# Altium PCB ESP32-EDU-BOARD V0.1.pcbdoc
Units mil, origin at the board's own origin, x right, y up, seen from the top; angles counter-clockwise.
Board outline 8230 x 5950 mil, 2 copper layers (Top Layer, Bottom Layer); 66 components, 74 nets, 230 pads, 141 vias.
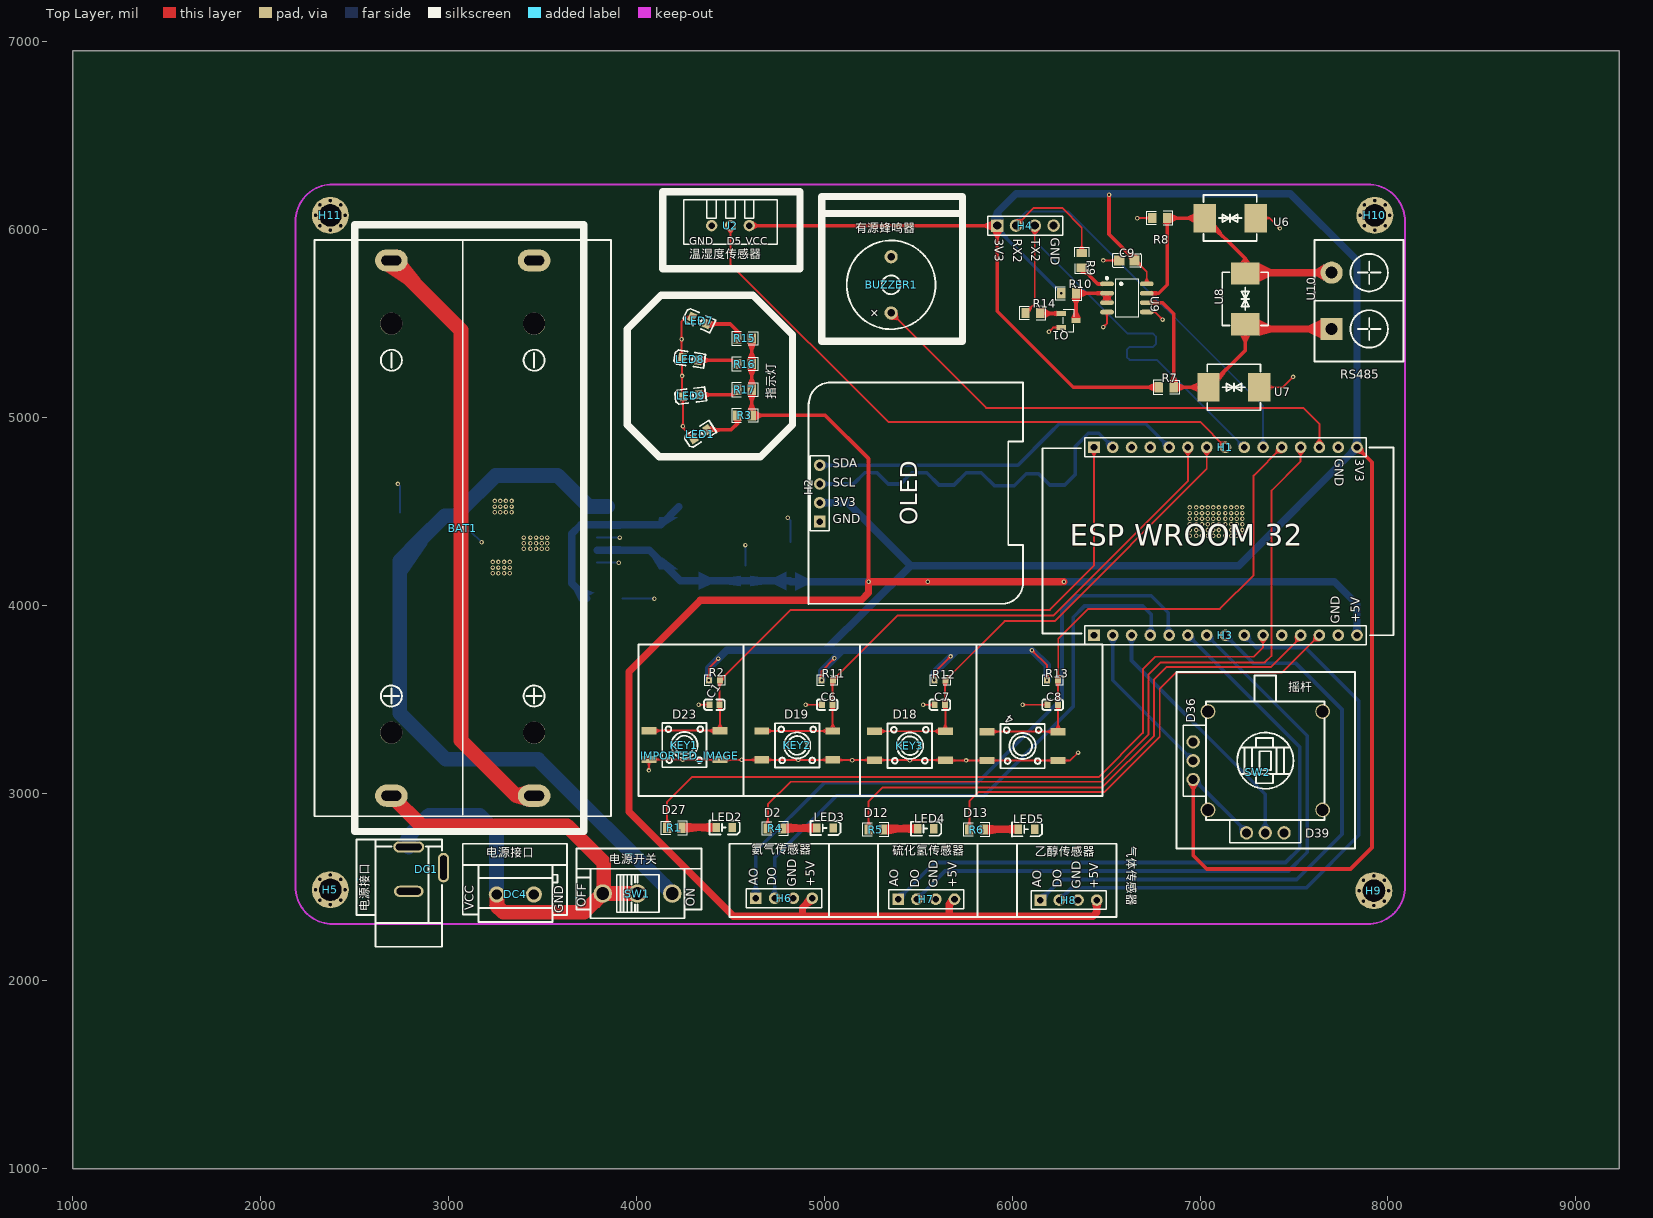
[diagram p0: Top Layer view]
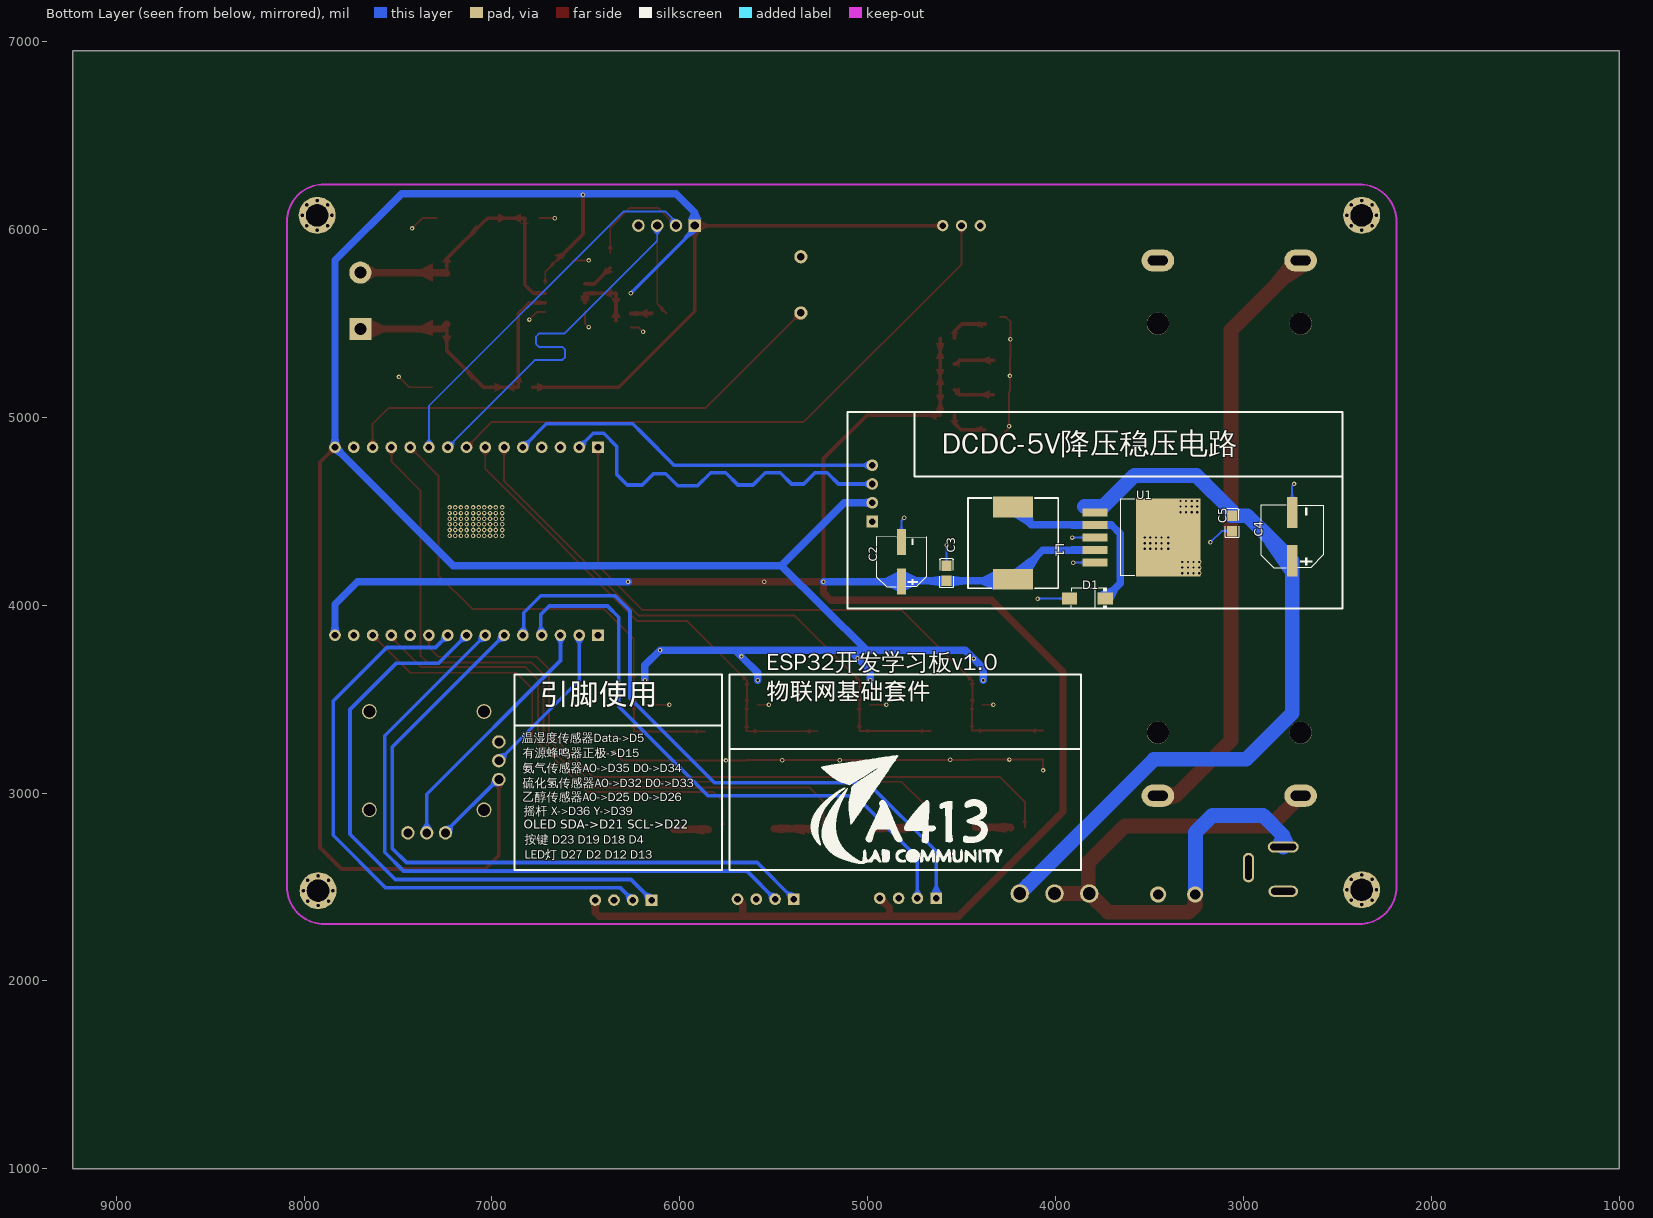
[diagram p1: Bottom Layer view, seen from below]

## Layer stack, top to bottom
Top Layer: signal copper (thickness not stored)
Dielectric: dielectric 12.6, FR-4, Dk 4.8
Bottom Layer: signal copper (thickness not stored)

## Board outline
9230,1000 1000,1000 1000,6950 9230,6950

## Components (designator, comment, footprint, x,y, rotation, side; value= is the part's Value field where it differs from the comment)
4 "K4-6×6_SMD" KEY-SMD_4P-L6.0-W6.0-P3.90-LS10.0 6055.01,3249.99 r0 top
BAT1 "18650并联电池盒" BAT-TH_18650-2 3075,4410 r90 top
BUZZER1 "TMB12A05" BUZ-TH_BD12.0-P7.60-D0.6-FD 5355,5705 r90 top
C1 "100nF" C0603 4415,3470 r0 top
C2 "220uF" CAP-SMD_BD6.3-L6.6-W6.6-FD 4820,4230 r270 bottom
C3 "100nF" C0805#1 4580,4170 r270 bottom
C4 "470uF" CAP-SMD_BD8.0-L8.3-W8.3-FD 2740,4365 r270 bottom
C5 "100nF" C0805#1 3060,4435 r270 bottom
C6 "100nF" C0603 5015,3470 r0 top
C7 "100nF" C0603 5615,3470 r0 top
C8 "100nF" C0603 6215,3470 r0 top
C9 "100nF" C0805#2 6610,5835 r180 top
D1 "SS54" SMA_L4.3-W2.6-LS5.0-RD 3830,4035 r180 bottom
DC1 "KH-DC-005-2.5" DC-IN-TH_KH-DC-005-2.5 2880,2595 r90 top
DC4 "KF301-5.0-2P" CONN-TH_P5.00_KF301-5.0-2P 3355,2460 r0 top
H1 "HDR-F-2.54_1x15" HDR-F-2.54_1X15 7135,4840 r0 top
H2 "HDR-F-2.54_1x4" HDR-F-2.54_1X4 4975,4595 r90 top
H3 "HDR-F-2.54_1x15" HDR-F-2.54_1X15 7135,3840 r0 top
H4 "12251104CNSNS295001" HDR-TH_4P-P2.54-V-M-1 6070,6020 r0 top
H5 "M3" M3 2370,2485 r0 top
H6 "HDR-F-2.54_1x4" HDR-F-2.54_1X4 4785,2440 r0 top
H7 "HDR-F-2.54_1x4" HDR-F-2.54_1X4 5542.5,2435 r0 top
H8 "HDR-F-2.54_1x4" HDR-F-2.54_1X4 6300,2430 r0 top
H9 "M3" M3 7925,2480 r0 top
H10 "M3" M3 7930,6075 r0 top
H11 "M3" M3 2370,6075 r0 top
IMPORTED_IMAGE "IMPORTED_IMAGE" IMPORTED_IMAGE 4284.22,3199.04 r0 top
KEY1 "K4-6×6_SMD" KEY-SMD_4P-L6.0-W6.0-P3.90-LS10.0 4255.01,3254.99 r0 top
KEY2 "K4-6×6_SMD" KEY-SMD_4P-L6.0-W6.0-P3.90-LS10.0 4855,3253.33 r0 top
KEY3 "K4-6×6_SMD" KEY-SMD_4P-L6.0-W6.0-P3.90-LS10.0 5455,3251.66 r0 top
L1 "33uH" IND-SMD_L12.0-W12.0 4225,4330 r90 bottom
LED1 "FC-2012HRK-620D" LED0805-RD_RED 4340,4910 r32 top
LED2 "FC-2012HRK-620D" LED0805-RD_RED 4466.66,2816.69 r180 top
LED3 "FC-2012HRK-620D" LED0805-RD_RED 5003.05,2813.41 r180 top
LED4 "FC-2012HRK-620D" LED0805-RD_RED 5539.44,2810.12 r180 top
LED5 "FC-2012HRK-620D" LED0805-RD_RED 6075.83,2806.99 r180 top
LED7 "FC-2012HRK-620D" LED0805-RD_RED 4335,5515 r335 top
LED8 "FC-2012HRK-620D" LED0805-RD_RED 4285,5310 r351 top
LED9 "FC-2012HRK-620D" LED0805-RD_RED 4290,5115 r7 top
Q1 "SS8050T23" SOT-23-3_L2.9-W1.3-P1.90-LS2.4-BR 6300,5515 r180 top
R1 "1kΩ" R0805#1 4200.83,2814.85 r0 top
R2 "10K" R0603 4415,3600 r180 top
R3 "1kΩ" R0805#1 4575,5010 r180 top
R4 "1kΩ" R0805#1 4737.22,2811.57 r0 top
R5 "1kΩ" R0805#1 5273.61,2805.15 r0 top
R6 "1kΩ" R0805#1 5810,2805 r0 top
R7 "4.7kΩ" R0805#2 6820,5160 r180 top
R8 "4.7kΩ" R0805#2 6785,6060 r0 top
R9 "1kΩ" R0805#2 6370,5835 r270 top
R10 "4.7kΩ" R0805#2 6300,5660 r0 top
R11 "10K" R0603 5015,3600 r180 top
R12 "10K" R0603 5615,3600 r180 top
R13 "10K" R0603 6215,3600 r180 top
R14 "4.7kΩ" R0805#2 6110,5555 r0 top
R15 "1kΩ" R0805#1 4575,5420 r180 top
R16 "1kΩ" R0805#1 4575,5283.33 r180 top
R17 "1kΩ" R0805#1 4575,5146.67 r180 top
SW1 "SS-12D10L3" SW-TH_SS-12D10L3 4005,2465 r0 top
SW2 "摇杆电位器 4方向 16*16 COPY COPY" SW-TH_3D_1616_4 7205,3030 r270 top
U1 "LM2596S-5.0/TR" TO-263-5_L10.2-W8.6-P1.70-LS14.4-TL 3595,4360 r0 bottom
U2 "华为牛逼3" DHT11 4500,6020 r0 top
U6 "SMCJ6.5CA-Q" SMC_L6.9-W5.9-LS7.9-BI 7160,6060 r0 top
U7 "SMCJ6.5CA-Q" SMC_L6.9-W5.9-LS7.9-BI 7180,5160 r180 top
U8 "SMCJ6.5CA-Q" SMC_L6.9-W5.9-LS7.9-BI 7240,5630 r90 top
U9 "MAX485ED" SOP-8_L4.9-W3.9-P1.27-LS6.0-BL 6610,5635 r270 top
U10 "KF7.62-2P" CONN-TH_KF7.62-2P 7700,5620 r90 top

## Footprints (in the part's own frame and the unit in brackets; to place one, negate y for a bottom-side part, rotate by r counter-clockwise, add the part's x,y. Pads: shape width x height; smd on the part's side, far side on the other; paste and mask are expansions set on the pad)
BAT-TH_18650-2 [mm]
  oval 3x4.4 hole 1.34 slot 2.7 at 90 deg: 1(-36.185,9.65) 2(-36.185,-9.65) 3(36.185,9.65) 4(36.185,-9.65)
  round 3 hole 3 unplated: ""(-27.65,-9.65) ""(-27.65,9.65) ""(27.65,-9.65) ""(27.65,9.65)
  silkscreen extent -38.95,-20.05 38.95,20.06
BUZ-TH_BD12.0-P7.60-D0.6-FD [mm]
  round 1.8 hole 1: 1(-3.8,0) 2(3.8,0)
  silkscreen extent -6,-6 6,6
C0603 [mm]
  rect 0.8x0.9 smd: 1(-0.7,0) 2(0.7,0)
  silkscreen extent -1.41,-0.71 1.39,0.72
C0805#1 [mm]
  rect 1.41x1.35 smd: 1(1.03,0) 2(-1.03,0)
  silkscreen extent -1.96,-0.9 1.96,0.9
C0805#2 [mm]
  rect 1.41x1.35 smd: 1(-1.03,0) 2(1.03,0)
  silkscreen extent -1.96,-0.9 1.96,0.9
CAP-SMD_BD6.3-L6.6-W6.6-FD [mm]
  rect 3.5x1.2 smd: 1(2.67,0) 2(-2.67,0)
  silkscreen extent -3.38,-3.38 3.38,3.38
CAP-SMD_BD8.0-L8.3-W8.3-FD [mm]
  rect 4.2x1.4 smd: 1(3.267,0) 2(-3.267,0)
  silkscreen extent -4.2,-4.23 4.2,4.23
CONN-TH_KF7.62-2P [mm]
  rect 3x3 hole 1.6: 1(-3.81,0)
  round 3 hole 1.6: 2(3.81,0)
  silkscreen extent -8.22,-9.7 8.22,2.3
CONN-TH_P5.00_KF301-5.0-2P [mm]
  round 2.2 hole 1.4: 1(-2.5,0) 2(2.5,0)
  silkscreen extent -5,-3.7 5.71,4
DC-IN-TH_KH-DC-005-2.5 [mm]
  oval 1.5x4.2 hole 0.9 slot 3.5 at 90 deg: 1(3,2.35)
  oval 1.5x4 hole 0.9 slot 3.3 at 90 deg: 2(-3,2.35)
  oval 4x1.5 hole 0.9 slot 3.3 at 0 deg: 3(0.2,-2.35)
  silkscreen extent -10.5,-2.15 4,6.85
DHT11 [mil]
  round 60 hole 36: 1(-100,0) 2(0,0) 3(100,0)
  silkscreen extent -248,-98 248,138
HDR-F-2.54_1X4 [mil]
  rect 62x62 hole 35: 1(-150,0)
  round 62 hole 35: 2(-50,0) 3(50,0) 4(150,0)
  silkscreen extent -200,-50 200,50
HDR-F-2.54_1X15 [mil]
  rect 62x62 hole 35: 1(-700,0)
  round 62 hole 35: 2(-600,0) 3(-500,0) 4(-400,0) 5(-300,0) 6(-200,0) 7(-100,0) 8(0,0) 9(100,0) 10(200,0) 11(300,0) 12(400,0) 13(500,0) 14(600,0) 15(700,0)
  silkscreen extent -750,-50 750,50
HDR-TH_4P-P2.54-V-M-1 [mm]
  rect 1.7x1.7 hole 1.1: 1(-3.81,0)
  round 1.7 hole 1.1: 2(-1.27,0) 3(1.27,0) 4(3.81,0)
  silkscreen extent -5.08,-1.27 5.08,1.27
IMPORTED_IMAGE [mil]
IND-SMD_L12.0-W12.0 [mm]
  rect 2.8x5.4 smd: 1(-4.9,0) 2(4.9,0)
  silkscreen extent -6.1,-6.1 6.1,6.1
KEY-SMD_4P-L6.0-W6.0-P3.90-LS10.0 [mm]
  rect 2x1 smd: 1(-4.8,1.95) 2(4.8,1.95) 3(-4.8,-1.95) 4(4.8,-1.95)
  silkscreen extent -3,-3 3,3
LED0805-RD_RED [mm]
  rect 1x1.25 smd: 1(-1.1,0) 2(1.1,0)
  silkscreen extent -2.1,-0.95 1.98,0.96
M3 [mm]
  round 0.6 hole 0.4 slot 0.405 at 0 deg: 1(-2,0) 1(-1.41,-1.41) 1(-1.41,1.41) 1(0,-2) 1(0,2) 1(1.41,-1.41) 1(1.41,1.41) 1(2,0)
  round 5 hole 3 slot 3.005 at 0 deg: 1(0,0)
R0603 [mil]
  rect 31.75x34.02 smd: 1(-29.65,0) 2(29.65,0)
  silkscreen extent -55,-26 55,26
R0805#1 [mil]
  rect 44.59x54.21 smd: 1(-38.04,0) 2(38.04,0)
  silkscreen extent -69,-36 69,36
R0805#2 [mil]
  rect 44.59x54.21 smd: 1(-39.37,0) 2(39.37,0)
  silkscreen extent -69,-36 69,36
SMA_L4.3-W2.6-LS5.0-RD [mm]
  rect 2.046x1.62 smd: 1(2.404,0.009) 2(-2.404,-0.009)
  silkscreen extent -2.16,-1.44 2.61,1.44
SMC_L6.9-W5.9-LS7.9-BI [mm]
  rect 3.03x3.82 smd: 1(-3.435,0) 2(3.435,0)
  silkscreen extent -3.6,-3.11 3.6,3.11
SOP-8_L4.9-W3.9-P1.27-LS6.0-BL [mm]
  oval 0.63x1.865 smd: 1(-1.905,-2.682) 2(-0.635,-2.682) 3(0.635,-2.682) 4(1.905,-2.682) 5(1.905,2.682) 6(0.635,2.682) 7(-0.635,2.682) 8(-1.905,2.682)
  silkscreen extent -2.82,-2.83 2.58,1.52
SOT-23-3_L2.9-W1.3-P1.90-LS2.4-BR [mm]
  rect 1.25x0.7 smd: 1(1,-0.95) 2(1,0.95) 3(-1,0)
  silkscreen extent -0.73,-1.53 0.73,1.53
SW-TH_3D_1616_4 [mm]
  round 1.8 hole 1.2: 1(6.146,6.146) 2(6.146,3.606) 3(6.146,1.066) (1)(-1.066,-6.146) (2)(-3.606,-6.146) (3)(-6.146,-6.146)
  round 2 hole 1.6: 4(-10.255,11.355) 4(-10.255,-4.144) 4(3.044,-4.144) 4(3.044,11.355)
  silkscreen extent -15.11,-7.49 7.49,11.61
SW-TH_SS-12D10L3 [mm]
  round 2.5 hole 1.7: 1(-4.7,0) 2(0,0) 3(4.7,0)
  silkscreen extent -6.35,-3.35 6.35,3.35
TO-263-5_L10.2-W8.6-P1.70-LS14.4-TL [mm]
  rect 3.4x1.1 smd: 1(4.953,-3.4) 2(4.953,-1.7) 3(4.953,0) 4(4.953,1.7) 5(4.953,3.4)
  rect 8.705x10.587 smd: 6(-4.953,0)
  silkscreen extent -0.45,-5.17 1.52,5.17

## Via types
v1: diameter 24, hole 12, Top Layer to Bottom Layer, tented both sides, 141 vias

## Nets (pads, with @x,y where several pads share a name; then routed paths per layer and width w, separated by ;. In a path a pad name is that pad's centre, name@x,y a point inside that pad or via, vN(x,y) a via of type N, cw(c..) or ccw(c..) an arc to the next point about the centre after c; other vN are vias at no path point)
3V3: C9.1 H1.15 H2.2 H4.1 R2.2 R7.2 R10.1 R11.2 R12.2 R13.2 SW2.3 SW2.(1) U2.3 U9.8 | length 18009.2
  Top Layer w10: R2.2 4385.3,3665.3 v1(4435.58,3715.58) ; v1(4985.34,3600) 4985.3,3649.1 v1(5053.49,3717.27) ; v1(5585.34,3600) 5585.3,3640.3 v1(5671.78,3726.78) ; v1(6105,3760) 6185.3,3679.7 v1(6185.34,3600) ; C9.1@6649.4,5840 6715.6,5773.8 U9.8
  Top Layer w19.68: U2.3 H4.1 5920,5565 6325,5160 R7.2 ; v1(6515,6185) 6515,5974.4 C9.1@6649.4,5840 ; 6963.1,3072 6963.1,2667 7035,2595 7800,2595 7915,2710 7915,4760 H1.15
  Bottom Layer w19.68: H4.1 5920,6000.6 v1(6260.63,5660) ; 6963.05,3071.95 6968.05,3071.95 SW2.3@7251.95,2788.05
  Bottom Layer w39.37: v1(4385,3600) 4385,3665 v1(4435.58,3715.58) 4480,3760 5005,3760 ; H2.2 5125,4545 5460,4210 ; v1(4985.34,3600) 4985.34,3649.12 v1(5053.49,3717.27) 5096.22,3760 ; v1(5585.34,3600) 5585.3,3640.3 v1(5671.78,3726.78) 5705,3760 5705.6,3760 ; H4.1 5920,6090 6020,6190 7480,6190 7835,5835 H1.15 7205,4210 5460,4210 ; v1(6185.34,3600) 6185.34,3679.66 v1(6105,3760) 5005,3760 ; 5005,3760 5010,3760 5010,3765 5460,4210
+5V: C2.1 C3.1 H3.15 H6.4 H7.4 H8.4 L1.1 R3.1 R15.1 R16.1 R17.1 U1.4 | length 11376.7
  Top Layer w19.68: R15.1 R16.1 R17.1 R3.1 5005,5010 5235,4780 v1(5235,4125)
  Top Layer w39.37: 4883.34,2345 4883.34,2388.34 H6.4 ; 5664.78,2345 5664.78,2407.28 H7.4 ; v1(6275,4125) v1(5550,4125) v1(5235,4125) 5235,4065 5195,4025 4340,4025 3960,3645 3960,2900 4515,2345 6430,2345 6450,2365 H8.4
  Bottom Layer w39.37: U1.4 4069,4293.1 L1.1 4232.6,4129.5 4580,4129.5 4815.4,4129.5 C2.1 5234.9,4124.9 v1(5235,4125) ; v1(6275,4125) 7715,4125 7835,4005 H3.15
BAT1_2: BAT1.2 BAT1.3 | length 3219.7
  Top Layer w78.74: BAT1.3 3065,5464.7 3065,3280 3359.6,2985.4 BAT1.2
D2: H1.12 R4.1 | length 4497.6
  Top Layer w10: R4.1 4699.2,2939.2 4820,3060 6475,3060 6725,3310 6725,3630 6790,3695 7345,3695 7380,3730 7380,4610 7535,4765 H1.12
D4: 4.1 4.2 C8.2 H1.11 R13.1 | length 2796.1
  Top Layer w10: 4.1 4.2 6244,3468.6 C8.2 6242.6,3597.9 R13.1 6244.7,3820.3 6404.3,3980 7105,3980 7285,4160 7285,4690 H1.11
D5: H1.8 U2.2 | length 3243.9
  Top Layer w10: U2.2 4500,5815 5340,4975 7000,4975 H1.8
D12: H3.12 R5.1 | length 2997.8
  Top Layer w10: R5.1 5235.6,2955.6 5310,3030 6480,3030 6755,3305 6755,3605 6820,3670 7375,3670 7535,3830 H3.12
D13: H3.13 R6.1 | length 2530.1
  Top Layer w10: R6.1 5772,2957 5820,3005 6490,3005 6785,3300 6785,3555 6870,3640 7435,3640 H3.13
D15: BUZZER1.1 H1.13 | length 2649.5
  Top Layer w10: BUZZER1.1 5860.39,5050 7550,5050 7635,4965 H1.13
D18: C7.2 H1.7 KEY3.1 KEY3.2 R12.1 | length 2622.3
  Top Layer w10: KEY3.1 KEY3.2 5644,3468.6 C7.2 5642.6,3597.9 R12.1 5959.7,3915 6225,3915 7035,4725 H1.7
D19: C6.2 H1.6 KEY2.1 KEY2.2 R11.1 | length 3158.7
  Top Layer w10: KEY2.1 KEY2.2 5044,3468.6 C6.2 5042.6,3597.9 R11.1 5389.7,3945 6220,3945 6935,4660 H1.6
D21: H1.5 H2.4 | length 2002.9
  Bottom Layer w19.68: H2.4 6030,4745 6198.8,4913.8 6250,4965 6710,4965 H1.5
D22: H1.2 H2.3 | length 2002
  Bottom Layer w19.68: H2.3 5155,4645 5215,4705 5280,4705 5340,4645 5405,4645 5465,4705 5545,4705 5610,4640 5690,4640 5755,4705 5835,4705 5905,4635 6010,4635 6075,4700 6140,4700 6200,4640 6280,4640 6335,4695 6335,4845 6405,4915 6460,4915 H1.2
D23: C1.2 H1.1 KEY1.1 KEY1.2 R2.1 | length 3520.6
  Top Layer w10: KEY1.1 KEY1.2 4444,3468.6 C1.2 4442.6,3597.9 R2.1 4819.7,3975 6200,3975 6435,4210 H1.1
D25: H3.8 H8.1 | length 3198.6
  Bottom Layer w19.68: H8.1 6260,2540 7515,2540 7755,2780 7755,3445 7510,3690 7285,3690 H3.8
D26: H3.9 H8.2 | length 3207.9
  Bottom Layer w19.68: H8.2 6315,2495 7565,2495 7845,2775 7845,3490 7560,3775 7300,3775 H3.9
D27: H3.10 R1.1 | length 3914.8
  Top Layer w10: R1.1 4162.8,2952.8 4295,3085 6460,3085 6695,3320 6695,3660 6760,3725 7285,3725 7335,3775 H3.10
D32: H3.6 H7.1 | length 3630.8
  Bottom Layer w19.68: H7.1 5587.5,2630 7455,2630 7530,2705 7530,3245 H3.6
D33: H3.7 H7.2 | length 3557.7
  Bottom Layer w19.68: H7.2 5642.5,2585 7470,2585 7570,2685 7570,3305 H3.7
D34: H3.4 H6.2 | length 3184
  Bottom Layer w19.68: H6.2 4735,2655 5065,2985 5850,2985 6325,3460 6325,3935 6385,3995 6695,3995 6740,3950 6740,3845 H3.4
D35: H3.5 H6.1 | length 3440.1
  Bottom Layer w19.68: H6.1 4635,2690 5000,3055 5815,3055 6265,3505 6265,3970 6345,4050 6740,4050 6830,3960 6830,3845 H3.5
D36: H3.2 SW2.(2) | length 845.4
  Bottom Layer w19.68: H3.2 6535,3600 6963.05,3171.95
D39: H3.3 SW2.2 | length 1346.8
  Bottom Layer w19.68: H3.3 6635,3705 7346.95,2993.05 SW2.2
DC1_1: BAT1.1 DC1.1 DC4.1 SW1.1 SW1.2 | length 3248.8
  Top Layer w78.74: BAT1.1 2855.47,2825 3630,2825 3825,2630 3825,2470.04 SW1.1 ; DC4.1 3256.58,2398.42 3290,2365 3719.96,2365 SW1.1 ; SW1.2 SW1.1
  Bottom Layer w78.74: DC1.1 2787.5,2772.5 2895,2880 3165,2880 3255,2790 3255,2461.6 DC4.1
GND: 4.3 4.4 BAT1.4 BUZZER1.2 C1.1 C2.2 C3.2 C4.2 C5.1 C6.1 C7.1 C8.1 C9.2 D1.2 DC1.2 DC4.2 H1.14 H2.1 H3.14 H4.4 H6.3 H7.3 H8.3 KEY1.3 KEY1.4 KEY2.3 KEY2.4 KEY3.3 KEY3.4 LED1.1 LED2.1 LED3.1 LED4.1 LED5.1 LED7.1 LED8.1 LED9.1 Q1.2 R8.1 SW2.1 SW2.(3) U1.3 U1.5 U1.6 U2.1 U6.2 U7.1 U9.4 U9.5 | length 5146.2
  Top Layer w10: v1(4066.03,3120) KEY1.3 v1(4245.18,3178.22) KEY1.4 4445.6,3176.6 v1(4559.93,3176.55) KEY2.3 v1(4860.5,3176.55) KEY2.4 5045.6,3174.9 v1(5148.4,3174.89) KEY3.3 v1(5454.68,3174.89) KEY3.4 5645.6,3173.2 v1(5753.97,3173.22) 4.3 4.4 6308.2,3173.2 v1(6350,3215) ; LED7.1@4295.8,5533.3 4263.3,5533.3 4240,5510 v1(4240,5414.86) 4240,5319 LED8.1 v1(4242.22,5219.86) 4242.2,5140 4247,5135.2 LED9.1 v1(4247.01,4951.91) 4247,4943.3 LED1.1@4303.3,4887.1 ; v1(4330,3470) C1.1 ; v1(4900,3470) C6.1 ; v1(5525,3470) C7.1 ; v1(6055,3470) C8.1 ; v1(6195,5455) 6217.6,5477.6 Q1.2 ; v1(6485,5480) 6504.4,5499.4 U9.4 ; v1(6485,5835) C9.2 ; v1(6665,6060) R8.1 ; U9.5 6760,5560 v1(6800,5520) ; U6.2 7370,6060 v1(7425,6005) ; U7.1 7440,5160 v1(7495,5215)
  Bottom Layer w10: v1(2730,4645) 2740,4635 C4.2 ; C5.1@3060,4394.5 3115.6,4394.5 v1(3175,4335) ; U1.5 v1(3905,4226.14) ; U1.3 v1(3910,4360) ; D1.2 v1(4095,4034.63) ; C3.2@4580,4210.5 v1(4580,4320) ; v1(4805,4465) 4820,4450 C2.2
  other v1: 3235,4170 3265,4170 3295,4170 3325,4170 3235,4200 3265,4200 3295,4200 3325,4200 3235,4230 3265,4230 3295,4230 3325,4230 3400,4300 3435,4300 3465,4300 3495,4300 3525,4300 3400,4330 3435,4330 3465,4330 3495,4330 3525,4330 3400,4360 3435,4360 3465,4360 3495,4360 3525,4360 6945,4370 6980,4370 7010,4370 7040,4370 7070,4370 7100,4370 7135,4370 7165,4370 7195,4370 7225,4370 6945,4400 6980,4400 7010,4400 7040,4400 7070,4400 7100,4400 7135,4400 7165,4400 7195,4400 7225,4400 6945,4430 6980,4430 7010,4430 7040,4430 7070,4430 7100,4430 7135,4430 7165,4430 7195,4430 7225,4430 6945,4460 6980,4460 7010,4460 7040,4460 7070,4460 7100,4460 7135,4460 7165,4460 7195,4460 7225,4460 6945,4490 6980,4490 7010,4490 7040,4490 7070,4490 7100,4490 7135,4490 7165,4490 7195,4490 7225,4490 3245,4495 3275,4495 3305,4495 3335,4495 6945,4520 6980,4520 7010,4520 7040,4520 7070,4520 7100,4520 7135,4520 7165,4520 7195,4520 7225,4520 3245,4525 3275,4525 3305,4525 3335,4525 3245,4555 3275,4555 3305,4555 3335,4555
L1_2: D1.1 L1.2 U1.2 | length 1007.1
  Bottom Layer w39.37: D1.1 3655,4115.7 3655,4380 3701.9,4426.9 U1.2 4129,4426.9 L1.2
Q1_1: Q1.1 R14.2 | length 112.3
  Top Layer w19.68: R14.2 6152,5552.4 Q1.1
R1_2: LED2.2 R1.2 | length 185.2
  Top Layer w39.37: R1.2 4240.7,2816.7 LED2.2
R3_2: LED1.2 R3.2 | length 217.4
  Top Layer w19.68: LED1.2@4376.7,4933 4502.9,4933 4537,4967 R3.2
R4_2: LED3.2 R4.2 | length 185.1
  Top Layer w39.37: R4.2 4777.1,2813.4 LED3.2
R5_2: LED4.2 R5.2 | length 186.5
  Top Layer w39.37: R5.2 5316.6,2810.1 LED4.2
R6_2: LED5.2 R6.2 | length 185.3
  Top Layer w39.37: R6.2 5850,2807 LED5.2
R9_2: R9.2 U9.1 | length 169.9
  Top Layer w19.68: R9.2 6455.6,5710 U9.1
R15_2: LED7.2 R15.2 | length 216.7
  Top Layer w19.68: LED7.2@4374.3,5496.7 4498.3,5496.7 4537,5458 R15.2
R16_2: LED8.2 R16.2 | length 217.4
  Top Layer w19.68: LED8.2 4510,5303.2 4529.9,5283.3 R16.2
R17_2: LED9.2 R17.2 | length 214.9
  Top Layer w19.68: LED9.2 4510.6,5120.3 R17.2
RX2: H1.10 H4.2 R9.1 | length 2574.9
  Top Layer w10: H4.2 6115,6115 6265,6115 6370,6010 R9.1
  Bottom Layer w10: H4.2 6020,6040 6075,6095 6300,6095 7335,5060 H1.10
S$7036: 
S$7049: 
S$7068: 
S$7072: 
S$7076: 
S$7080: 
S$7084: 
S$7088: 
S$7101: 
S$27367: 
S$27392: 
S$31513: 
S$31517: 
S$31521: 
S$31525: 
S$31529: 
S$31611: 
S$31615: 
S$31619: 
S$39779: 
S$39783: 
S$39787: 
S$39803: 
S$39855: 
S$39859: 
S$39863: 
S$39867: 
S$39871: 
S$39875: 
S$43471: 
S$44675: 
S$45294: 
TX2: H1.9 H4.3 R14.1 | length 2493
  Top Layer w10: R14.1 6120,5604.4 H4.3
  Bottom Layer w10: H4.3 6120,5940 6615,5445 6750,5445 6765,5430 6765,5390 6750,5375 6625,5375 6610,5360 6610,5320 6625,5305 6770,5305 H1.9
U6_1: R8.2 U6.1 U8.2 U9.7 U10.2 | length 1545.8
  Top Layer w19.68: U9.7 6780,5660 6825,5705 6825,6020.6 ; 6825,6009.2 6824.4,6026.3 R8.2 U6.1 7240,5844.8 U8.2 ; U6.1@7024.77,6055 U6.1
  Top Layer w39.37: U8.2 7244.8,5770 U10.2
U7_2: R7.1 U7.2 U8.1 U9.6 U10.1 | length 1630.3
  Top Layer w19.68: U9.6 6800,5610 6859.4,5550.6 R7.1 U7.2 7240,5355.2 U8.1
  Top Layer w39.37: U8.1 7264.8,5470 U10.1
U9_2: Q1.3 R10.2 U9.2 U9.3 | length 360
  Top Layer w19.68: Q1.3 R10.2 U9.2 U9.3
VIN: C4.1 C5.2 SW1.3 U1.1 | length 4034.6
  Bottom Layer w78.74: 3845,4525 3745,4525 3580,4690 3250,4690 3060,4500 3060,4475.5 2979.2,4475.5 C4.1 2740,3425 2985,3180 3475,3180 SW1.3
pads on no net: BAT1. DC1.3 H1.3 H1.4 H3.1 H3.11 H5.1 H9.1 H10.1 H11.1 SW2.4

## Polygon pours and split planes (outlines as drawn)
GND on Top Layer (solid): 1810,6450 8580,6450 8580,1710 8370,1500 1905,1500 1755,1650
GND on Bottom Layer (solid): 1530,6450 8700,6450 8730,6420 8730,1810 8595,1675 1685,1675 1500,1860

## Keep-outs
Keep-Out Layer:
  lines w10: 2185,2499.85 ccw(c2381.85,2499.85) 2381.85,2303 ; 2185,6043.15 cw(c2381.85,6043.15) 2381.85,6240 ; 7893.65,2303 ccw(c7893.65,2499.85) 8090.5,2499.85 ; 7893.65,6240 cw(c7893.65,6043.15) 8090.5,6043.15

## Other copper
Top Layer:
  region net D5: 4522.5,6000.16 4477.5,6000.16 4495,5979.16 4505,5979.16
  region net 3V3: 4619.84,5997.5 4619.84,6042.5 4640.84,6029.84 4640.84,6010.16
  region net 3V3: 6989.63,3048.51 6936.48,3048.51 6953.21,3023.71 6972.89,3023.71
  region net D15: 5352.78,5520.03 5390.36,5557.61 5392.65,5524.82 5385.58,5517.74
  region net DC1_1: 3289.06,2431.36 3224.1,2431.36 3217.21,2401.04 3295.95,2401.04
  region net 3V3: 7833.06,4809.06 7865.94,4841.94 7871.8,4817.12 7857.88,4803.2
  region net D15: 7658.25,4860.5 7611.75,4860.5 7630,4882.2 7640,4882.2
  region net D2: 7558.25,4819.5 7511.75,4819.5 7530,4797.8 7540,4797.8
  region net D4: 7404.06,4841.94 7436.94,4809.06 7408.69,4806.62 7401.62,4813.69
  region net D5: 7104.06,4838.06 7136.94,4870.94 7108.69,4873.38 7101.62,4866.31
  region net D18: 7058.25,4819.5 7011.75,4819.5 7030,4797.8 7040,4797.8
  region net D19: 6958.25,4819.5 6911.75,4819.5 6930,4797.8 6940,4797.8
  region net D13: 7604.06,3841.94 7636.94,3809.06 7608.69,3806.62 7601.62,3813.69
  region net D12: 7542.1,3809.82 7504.17,3836.73 7506.44,3808.51 7514.72,3802.64
  region net D27: 7358.25,3819.5 7311.75,3819.5 7330,3797.8 7340,3797.8
  region net +5V: 4904.06,2441.94 4936.94,2409.06 4919.08,2396.24 4891.24,2424.08
  region net +5V: 5661.56,2436.94 5694.44,2404.06 5678.69,2393.36 5650.86,2421.19
  region net +5V: 6473.25,2409.5 6426.75,2409.5 6430.31,2387.8 6469.69,2387.8
  region net RX2: 6017.9,6053.4 6053.4,6017.9 6055.75,6048.68 6048.68,6055.75
  region net TX2: 6145.1,5997.87 6094.9,5997.87 6115,5974.44 6125,5974.44
  region net DC1_1: 3823.04,2415.88 3770.84,2468.08 3744.75,2445.46 3800.42,2389.79
  region net DC1_1: 3852.51,2428.09 3852.51,2501.91 3886.96,2504.37 3886.96,2425.63
  region net DC1_1: 3972.45,2428.09 3972.45,2501.91 3938,2504.37 3938,2425.63
  region net U6_1: 7660.94,5725.71 7660.94,5814.29 7619.6,5789.69 7619.6,5750.31
  region net +5V: 5226,4132.94 5244,4132.94 5244.84,4141.34 5225.16,4141.34
  region net 3V3: 4394.16,3607.75 4376.17,3608.12 4380.34,3616.44 4390.34,3616.23
  region net 3V3: 4976.34,3607.94 4994.34,3607.94 4990.34,3616.34 4980.34,3616.34
  region net 3V3: 5576.34,3607.94 5594.34,3607.94 5590.34,3616.34 5580.34,3616.34
  region net 3V3: 6176.34,3607.94 6194.34,3607.94 6190.34,3616.34 6180.34,3616.34
  region net 3V3: 6506,6177.06 6524,6177.06 6524.84,6168.66 6505.16,6168.66
  region net 3V3: 4436.33,3703.6 4423.6,3716.33 4420.49,3707.56 4427.56,3700.49
  region net 3V3: 5054.24,3705.29 5041.51,3718.02 5038.4,3709.25 5045.47,3702.18
  region net 3V3: 5672.53,3714.81 5659.81,3727.53 5656.69,3718.77 5663.77,3711.69
  region net 3V3: 6116.98,3760.75 6104.25,3748.02 6113.02,3744.91 6120.09,3751.98
  region net 3V3: 6622.79,5840.68 6667.35,5861.57 6627.72,5875.6 6608.77,5866.71
  region net 3V3: 6678.31,5831.21 6668.01,5808.43 6681.18,5801.15 6685.58,5810.89
  region net D4: 5905.4,3339.3 5905.4,3314.3 5920.4,3321.8 5920.4,3331.8
  region net D4: 6231.5,3346.46 6256.5,3346.46 6249,3361.46 6239,3361.46
  region net D4: 6204.61,3314.3 6204.61,3339.3 6189.61,3331.8 6189.61,3321.8
  region net R15_2: 4402.49,5510.68 4385.57,5474.4 4423.96,5486.86 4433.14,5506.54
  region net R16_2: 4351.07,5324.45 4343.85,5278.9 4376.04,5293.36 4379.16,5313.04
  region net R17_2: 4349.82,5144.72 4355.52,5098.26 4383.77,5110.46 4381.36,5130.14
  region net R15_2: 4514.66,5447.11 4559.25,5447.11 4546.84,5458 4527.16,5458
  region net +5V: 4590.75,5392.89 4635.34,5392.89 4622.84,5363.37 4603.16,5363.37
  region net R16_2: 4514.66,5261.38 4518.5,5310.44 4516.96,5310.16 4508.99,5290.29
  region net +5V: 4635.34,5310.44 4590.75,5310.44 4603.16,5339.97 4622.84,5339.97
  region net +5V: 4590.75,5256.23 4635.34,5256.23 4622.84,5226.7 4603.16,5226.7
  region net R17_2: 4536.21,5119.56 4514.66,5163.8 4506.04,5129.66 4517.56,5113.34
  region net +5V: 4635.34,5173.77 4590.75,5173.77 4603.16,5203.3 4622.84,5203.3
  region net +5V: 4590.75,5119.56 4635.34,5119.56 4622.84,5090.03 4603.16,5090.03
  region net R3_2: 4386.87,4953.87 4406.46,4922.52 4440.88,4923.16 4428.58,4942.84
  region net R4_2: 4940.06,2788.79 4940.06,2838.01 4881,2833.09 4881,2793.72
  region net R5_2: 5476.45,2785.51 5476.45,2834.72 5417.4,2829.79 5417.4,2790.42
  region net R6_2: 6012.84,2782.38 6012.84,2831.59 5953.78,2826.68 5953.78,2787.31
  region net D23: 4105.4,3344.3 4105.4,3319.3 4120.4,3326.8 4120.4,3336.8
  region net D23: 4431.5,3351.46 4456.5,3351.46 4449,3366.46 4439,3366.46
  region net D23: 4404.61,3319.3 4404.61,3344.3 4389.61,3336.8 4389.61,3326.8
  region net D19: 4705.4,3342.6 4705.4,3317.6 4720.4,3325.1 4720.4,3335.1
  region net D19: 5031.5,3349.79 5056.5,3349.79 5049,3364.79 5039,3364.79
  region net D19: 5004.61,3317.6 5004.61,3342.6 4989.61,3335.1 4989.61,3325.1
  region net D18: 5305.4,3340.9 5305.4,3315.9 5320.4,3323.4 5320.4,3333.4
  region net D18: 5631.5,3348.12 5656.5,3348.12 5649,3363.12 5639,3363.12
  region net D18: 5604.61,3315.9 5604.61,3340.9 5589.61,3333.4 5589.61,3323.4
  region net D23: 4430.1,3487.72 4455.1,3487.72 4447.6,3502.72 4437.6,3502.72
  region net D23: 4456.5,3452.28 4431.5,3452.28 4439,3437.28 4449,3437.28
  region net D19: 5030.1,3487.72 5055.1,3487.72 5047.6,3502.72 5037.6,3502.72
  region net D19: 5056.5,3452.28 5031.5,3452.28 5039,3437.28 5049,3437.28
  region net D18: 5630.1,3487.72 5655.1,3487.72 5647.6,3502.72 5637.6,3502.72
  region net D18: 5656.5,3452.28 5631.5,3452.28 5639,3437.28 5649,3437.28
  region net D4: 6230.1,3487.72 6255.1,3487.72 6247.6,3502.72 6237.6,3502.72
  region net D4: 6256.5,3452.28 6231.5,3452.28 6239,3437.28 6249,3437.28
  region net D23: 6447.5,4809 6422.5,4809 6430,4794 6440,4794
  region net 3V3: 5886.53,5995.39 5886.53,6044.61 5857.01,6029.84 5857.01,6010.16
  region net 3V3: 5944.61,5986.54 5895.39,5986.54 5910.16,5957.01 5929.84,5957.01
  region net R1_2: 4403.67,2792.08 4403.67,2841.29 4344.61,2836.38 4344.61,2797.01
  region net Q1_1: 6236.03,5538.62 6236.03,5566.18 6206.5,5562.24 6206.5,5542.56
  region net U9_2: 6314.79,5528.78 6363.97,5528.78 6349.24,5558.31 6329.56,5558.31
  region net R1_2: 4261.17,2841.96 4261.17,2787.74 4320.22,2797.01 4320.22,2836.38
  region net D27: 4175.3,2841.96 4150.3,2841.96 4157.8,2856.96 4167.8,2856.96
  region net R3_2: 4559.25,4982.89 4514.66,4982.89 4527.16,4967 4546.84,4967
  region net +5V: 4635.34,4985.39 4635.34,5034.61 4664.86,5019.84 4664.86,5000.16
  region net +5V: 4635.34,5037.11 4590.75,5037.11 4603.16,5066.63 4622.84,5066.63
  region net R4_2: 4797.56,2838.67 4797.56,2784.46 4856.61,2793.72 4856.61,2833.09
  region net D2: 4711.7,2838.67 4686.7,2838.67 4694.2,2853.67 4704.2,2853.67
  region net R5_2: 5333.95,2832.25 5333.95,2778.04 5393,2790.42 5393,2829.79
  region net D12: 5248.1,2832.25 5223.1,2832.25 5230.6,2847.25 5240.6,2847.25
  region net R6_2: 5870.34,2832.11 5870.34,2777.89 5929.39,2787.31 5929.39,2826.68
  region net D13: 5784.5,2832.11 5759.5,2832.11 5767,2847.11 5777,2847.11
  region net 3V3: 4372.84,3617.01 4397.84,3617.01 4390.34,3632.01 4380.34,3632.01
  region net D23: 4446,3617.01 4460.53,3596.67 4466.24,3614.47 4460.35,3622.72
  region net D23: 4430.1,3582.99 4455.1,3582.99 4447.6,3567.99 4437.6,3567.99
  region net 3V3: 4972.84,3617.01 4997.84,3617.01 4990.34,3632.01 4980.34,3632.01
  region net D19: 5046,3617.01 5060.53,3596.67 5066.24,3614.47 5060.35,3622.72
  region net D19: 5030.1,3582.99 5055.1,3582.99 5047.6,3567.99 5037.6,3567.99
  region net 3V3: 5572.84,3617.01 5597.84,3617.01 5590.34,3632.01 5580.34,3632.01
  region net D18: 5646,3617.01 5660.53,3596.67 5666.24,3614.47 5660.35,3622.72
  region net D18: 5630.1,3582.99 5655.1,3582.99 5647.6,3567.99 5637.6,3567.99
  region net 3V3: 6172.84,3617.01 6197.84,3617.01 6190.34,3632.01 6180.34,3632.01
  region net D4: 6230.1,3582.99 6255.1,3582.99 6247.6,3567.99 6237.6,3567.99
  region net D4: 6257.2,3617.01 6232.2,3617.01 6239.7,3632.01 6249.7,3632.01
  region net 3V3: 6758.34,5135.39 6758.34,5184.61 6728.81,5169.84 6728.81,5150.16
  region net U7_2: 6881.66,5187.11 6837.08,5187.11 6849.56,5216.63 6869.24,5216.63
  region net U7_2: 6881.66,5135.39 6881.66,5184.61 6911.19,5169.84 6911.19,5150.16
  region net U6_1: 6846.66,6032.89 6802.08,6032.89 6814.56,6026.3 6834.24,6026.3
  region net U6_1: 6846.66,6084.61 6846.66,6035.39 6876.19,6050.16 6876.19,6069.84
  region net R9_2: 6397.1,5794.78 6352.81,5773.34 6392.12,5759.56 6410.88,5768.64
  region net RX2: 6382.5,5896.66 6357.5,5896.66 6365,5911.66 6375,5911.66
  region net U9_2: 6361.66,5632.89 6317.08,5632.89 6329.56,5603.37 6349.24,5603.37
  region net U9_2: 6361.66,5684.61 6361.66,5635.39 6391.19,5650.16 6391.19,5669.84
  region net Q1_1: 6171.66,5577.01 6171.66,5527.89 6201.19,5542.56 6201.19,5562.24
  region net TX2: 6088.19,5582.11 6092.92,5557.56 6103.68,5581.01 6101.4,5592.87
  region net U6_1: 7084.41,5984.8 7084.41,6024.99 7113.94,5984.78 7113.94,5956.94
  region net U6_1: 6965.12,6084.61 6965.12,6035.39 6935.59,6050.16 6935.59,6069.84
  region net U7_2: 6985.12,5184.61 6985.12,5135.39 6955.59,5150.16 6955.59,5169.84
  region net U7_2: 7104.4,5195 7104.4,5235.2 7133.93,5263.05 7133.93,5235.21
  region net U6_1: 7315.2,5720.79 7315.2,5819.21 7374.25,5789.69 7374.25,5750.31
  region net U6_1: 7264.61,5824.89 7215.39,5824.89 7230.16,5844.8 7249.84,5844.8
  region net U7_2: 7315.2,5435.12 7315.2,5519.21 7374.25,5489.69 7374.25,5450.31
  region net U7_2: 7215.39,5435.12 7264.61,5435.12 7249.84,5405.59 7230.16,5405.59
  region net U7_2: 7640.95,5420.79 7640.95,5519.21 7581.89,5489.69 7581.89,5450.31
  region net BAT1_2: 3427.37,3044.45 3427.35,2926.34 3359.59,2946.03 3359.61,3024.77
  region net BAT1_2: 2722.64,5893.66 2667.52,5775.55 2766.61,5707.41 2848.26,5737.12
  region net R9_2: 6480.08,5697.6 6480.08,5722.4 6455.6,5719.84 6455.6,5700.16
  region net U9_2: 6480.08,5647.6 6480.08,5672.4 6450.55,5669.84 6450.55,5650.16
  region net U9_2: 6528.7,5647.6 6480.08,5647.6 6494.56,5618.07 6514.24,5618.07
  region net U9_2: 6480.08,5622.4 6528.7,5622.4 6514.24,5651.93 6494.56,5651.93
  region net 3V3: 6703.1,5722.4 6728.1,5722.4 6720.6,5737.4 6710.6,5737.4
  region net U6_1: 6739.92,5647.6 6739.92,5672.4 6769.45,5669.84 6769.45,5650.16
  region net U7_2: 6739.92,5597.6 6739.92,5622.4 6769.45,5619.84 6769.45,5600.16
Bottom Layer:
  region net 3V3: 7251.75,2823.16 7211.52,2788.43 7207.96,2818.12 7222.9,2831.02
  region net D39: 7373.52,2811.49 7320.37,2811.49 7337.11,2836.29 7356.79,2836.29
  region net 3V3: 6998.16,3076.75 6963.43,3036.52 6993.12,3032.96 7006.02,3047.9
  region net D36: 6927.69,3169.73 6965.27,3207.31 6935.9,3213.02 6921.98,3199.1
  region net DC1_1: 3288.28,2489.51 3223.34,2487.76 3215.63,2517.88 3294.37,2520
  region net 3V3: 7804.06,4841.94 7836.94,4809.06 7819.08,4796.24 7791.24,4824.08
  region net 3V3: 7858.25,4860.5 7811.75,4860.5 7815.31,4882.2 7854.69,4882.2
  region net RX2: 7358.25,4860.5 7311.75,4860.5 7330,4882.2 7340,4882.2
  region net TX2: 7204.06,4838.06 7236.94,4870.94 7208.69,4873.38 7201.62,4866.31
  region net D21: 6804.06,4838.06 6836.94,4870.94 6812.12,4876.8 6798.2,4862.88
  region net D22: 6504.06,4838.06 6536.94,4870.94 6512.12,4876.8 6498.2,4862.88
  region net +5V: 7858.25,3860.5 7811.75,3860.5 7815.31,3882.2 7854.69,3882.2
  region net D26: 7233.06,3809.06 7265.94,3841.94 7271.8,3817.12 7257.88,3803.2
  region net D25: 7133.06,3809.06 7165.94,3841.94 7171.8,3817.12 7157.88,3803.2
  region net D33: 7033.06,3809.06 7065.94,3841.94 7071.8,3817.12 7057.88,3803.2
  region net D32: 6933.06,3809.06 6965.94,3841.94 6971.8,3817.12 6957.88,3803.2
  region net D35: 6855.66,3863.11 6809.48,3857.61 6820.16,3880.73 6839.84,3883.08
  region net D34: 6714.34,3863.11 6760.52,3857.61 6749.84,3880.73 6730.16,3883.08
  region net D39: 6658.25,3819.5 6611.75,3819.5 6625.16,3797.8 6644.84,3797.8
  region net D36: 6558.25,3819.5 6511.75,3819.5 6525.16,3797.8 6544.84,3797.8
  region net 3V3: 4995.5,4521.75 4995.5,4568.25 5017.2,4564.69 5017.2,4525.31
  region net D22: 4995.5,4621.75 4995.5,4668.25 5017.2,4654.84 5017.2,4635.16
  region net D21: 4995.5,4721.75 4995.5,4768.25 5017.2,4754.84 5017.2,4735.16
  region net D34: 4758.25,2460.5 4711.75,2460.5 4725.16,2482.2 4744.84,2482.2
  region net D33: 5490.56,2465.94 5523.44,2433.06 5529.3,2457.88 5515.38,2471.8
  region net D26: 6248.06,2460.94 6280.94,2428.06 6286.8,2452.88 6272.88,2466.8
  region net RX2: 6052.4,6028.38 6007.64,6051.1 6035.93,6063.01 6045.31,6058.24
  region net TX2: 6145.1,5997.87 6094.9,5997.87 6115,5974.44 6125,5974.44
  region net VIN: 4193.1,2514.12 4140.92,2461.9 4114.82,2484.51 4170.47,2540.21
  region net 3V3: 6261.37,5671.98 6248.65,5659.23 6242.11,5664.57 6256.01,5678.51
  region net D35: 4610.39,2471 4659.61,2471 4644.84,2500.53 4625.16,2500.53
  region net D32: 5388.7,2466 5423.5,2431.2 5433.94,2462.52 5420.02,2476.44
  region net D25: 6146.2,2461 6181,2426.2 6191.44,2457.52 6177.52,2471.44
  region net 3V3: 5953.47,5986.54 5909.46,5986.54 5949.67,5957.01 5977.51,5957.01
  region net 3V3: 5886.53,6053.46 5953.47,6053.46 5939.69,6090 5900.31,6090
  region net +5V: 4843.62,4075.69 4843.62,4174.11 4902.68,4144.58 4902.68,4105.21
  region net +5V: 4796.38,4178.71 4796.38,4080.29 4737.32,4109.81 4737.32,4149.18
  region net +5V: 4606.58,4157.2 4606.58,4101.69 4665.63,4109.81 4665.63,4149.18
  region net +5V: 4553.42,4101.69 4553.42,4157.2 4494.37,4149.18 4494.37,4109.81
  region net VIN: 2766.56,4319.05 2767.56,4153.7 2884.64,4325.31 2883.97,4435.98
  region net L1_2: 3695.07,4020.86 3775.63,4067.26 3704.27,4094.31 3668.94,4073.96
  region net +5V: 4219.11,4192.2 4120.68,4192.2 4083,4251.26 4138.68,4251.26
  region net +5V: 4331.3,4081.97 4331.3,4178.71 4390.35,4149.18 4390.35,4109.81
  region net L1_2: 4120.68,4467.8 4219.11,4467.8 4156.84,4426.9 4115.08,4440.82
  region net L1_2: 3856.93,4405.28 3856.93,4448.58 3915.98,4446.58 3915.98,4407.21
  region net L1_2: 3723.07,4448.58 3723.07,4405.28 3701.9,4407.21 3701.9,4446.58
  region net +5V: 3856.93,4271.42 3856.93,4314.72 3915.98,4312.79 3915.98,4273.42
  region net DC1_1: 2734.34,2742.64 2840.64,2742.64 2826.86,2772.49 2748.12,2772.49

## Silkscreen, mask and mechanical layers (free items; w line width, h text height)
Top Overlay:
  lines w10: 4010,2985 6480,2985 6480,3790 4010,3790 ; 4010,2985 4010,3790 ; 4010,2985 4570,2985 ; 4010,2985 4010,3790 ; 4010,3790 4570,3790 ; 4495,2340 6555,2340 ; 4495,2340 4495,2730 ; 4495,2340 5025,2340 5025,2730 4495,2730 ; 4495,2340 4495,2730 ; 4495,2730 6555,2730 ; 4570,2985 4570,3790 ; 4570,2985 5190,2985 ; 4570,2985 4570,3790 ; 4570,3790 5190,3790 ; 5190,2985 5190,3790 ; 5190,2985 5810,2985 5810,3790 5190,3790 ; 5190,2985 5190,3790 ; 6555,2340 6555,2730 ; 6555,2340 6555,2730 ; 6555,2340 6025,2340 6025,2730 6555,2730 ; 5285,2340 5815,2340 5815,2730 5285,2730 5285,2340 ; 6875,2705 7825,2705 7825,3645 6875,3645 6875,2705
  lines w10 net S$31611: 6365,4835 6160,4835 6160,3850 6370,3850
  lines w10 net S$31615: 7900,4840 8030,4840
  lines w10 net S$31619: 7905,3840 8030,3840 8030,4840
  lines w10 net S$39779: 3158.15,2353.45 3075,2353.45 3075,2730 3630,2730 3630,2350 3551.85,2350
  lines w10 net S$39783: 3075,2617.48 3158.15,2617.48
  lines w10 net S$39787: 3551.85,2617.48 3630,2617.48
  lines w10 net S$39803: 2610.32,2350 2510,2350 2510,2752.47 2617.58,2752.47
  lines w10 net S$39855: 3755,2380.23 3680,2380.23 3680,2550 3755,2550
  lines w10 net S$39859: 3680,2550 3680,2705
  lines w10 net S$39863: 3685,2596.89 3765.84,2596.89
  lines w10 net S$39867: 3680,2705 4270,2705
  lines w10 net S$39871: 4246.71,2596.89 4345,2596.89 4345,2380 4255,2380
  lines w10 net S$39875: 4270,2705 4345,2705 4345,2591.66
  lines w10 net S$7036: 4915,4005 4915.9,5075.78
  lines w10 net S$7049: 4917.59,5072.65 cw(c5030.36,5072.36) 5032.38,5185.11 ; 5942.98,4007.25 ccw(c5945,4120) 6057.74,4117.48
  lines w10 net S$7068: 5034.05,5185.5 6055,5185.5
  lines w10 net S$7072: 6057.65,4870.49 6057.65,5185.59
  lines w10 net S$7076: 5978.94,4870.49 6057.65,4870.49
  lines w10 net S$7080: 5978.94,4319.31 5978.94,4870.49
  lines w10 net S$7084: 5978.94,4319.29 6057.65,4319.29
  lines w10 net S$7088: 6057.65,4116.7 6057.65,4313.94
  lines w10 net S$7101: 4915.9,4007.25 5942.98,4007.25
  lines w39.37 net S$27367: 4120,4790 4130,4790 4660,4790 4830.4,4960.4 ; 4140,5650 4620,5650 ; 4620,5650 4620,5650 ; 4620,5650 4830,5440 4830,4965 4830.4,4960.4 ; 4830.4,4960.4 4830.4,4960.4
  lines w39.37 net S$27392: 4120,4790 3950,4960 3950,5470 4130,5650 4140,5650
  lines w39.37 net S$31513: 2565,6025 3710,6025
  lines w39.37 net S$31517: 2565,6025 2500,6025 2500,2795 3720,2795 3720,6025
  lines w39.37 net S$31521: 4140,5790 4870,5790 4870,6200 4140,6200 4140,5790
  lines w39.37 net S$31525: 4985,6090 4985,5405 5735,5405 5735,6085 4990,6085
  lines w39.37 net S$31529: 4985,6090 4985,6175 5735,6175 5735,6085
  text "有源蜂鸣器" at 5165,5970 h78.74
  text "GND" at 6190,5955 h78.74 r270
  text "3V3" at 5890,5950 h78.74 r270
  text "RX2" at 5990,5950 h78.74 r270
  text "TX2" at 6085,5950 h78.74 r270
  text "温湿度传感器" at 4280,5830 h80
  text "RS485" at 7745,5190 h80
  text "指示灯" at 4755,5095 h80 r90
  text "GND" at 7700,4780 h78.74 r270
  text "3V3" at 7810,4780 h78.74 r270
  text "SDA" at 5045,4715 h78.74 r1
  text "SCL" at 5045,4615 h78.74
  text "3V3" at 5045,4510 h78.74
  text "OLED" at 5525,4425 h157.48 r90
  text "GND" at 5045,4420 h78.74
  text "ESP WROOM 32" at 6305,4275 h196.85
  text "+5V" at 7865,3905 h78.74 r90
  text "GND" at 7760,3900 h78.74 r90
  text "摇杆" at 7470,3525 h80
  text "D23" at 4190,3380 h80
  text "D19" at 4785,3380 h80
  text "D18" at 5365,3380 h80
  text "D36" at 6990,3375 h80 r90
  text "D27" at 4135,2870 h80
  text "D2" at 4680,2855 h80 r1
  text "D12" at 5210,2855 h80
  text "D13" at 5740,2855 h80
  text "D39" at 7560,2745 h80
  text "气体传感器" at 6595,2720 h80 r270
  text "氨气传感器" at 4610,2660 h78.74
  text "硫化氢传感器" at 5360,2655 h78.74
  text "乙醇传感器" at 6120,2650 h78.74
  text "电源接口" at 3200,2645 h80
  text "电源开关" at 3855,2610 h80
  text "AO" at 4660,2505 h78.74 r89
  text "DO" at 4760,2505 h78.74 r90
  text "GND" at 4865,2500 h78.74 r90
  text "+5V" at 4965,2500 h78.74 r90
  text "AO" at 5410,2500 h78.74 r89
  text "DO" at 5520,2495 h78.74 r90
  text "GND" at 5620,2495 h78.74 r90
  text "+5V" at 5720,2495 h78.74 r90
  text "AO" at 6170,2495 h78.74 r89
  text "DO" at 6280,2495 h78.74 r90
  text "GND" at 6380,2490 h78.74 r90
  text "+5V" at 6475,2490 h78.74 r90
  text "ON" at 4325,2395 h78.74 r89
  text "OFF" at 3746.65,2391.69 h78.74 r89
  text "VCC" at 3150,2375 h78.74 r90
  text "电源接口" at 2590,2370 h80 r90
  text "GND" at 3625,2360 h78.74 r90
Bottom Overlay:
  lines w10: 2472.5,3982.5 5107.5,3982.5 5107.5,5027.5 2472.5,5027.5 2472.5,3982.5 ; 3865,2590 5735,2590 5735,3630 3865,3630 3865,2590 ; 5775,2590 6880,2590 6880,3360 5775,3360 5775,2590
  lines w10 net S$43471: 3865,3235 5735,3235
  lines w10 net S$44675: 5775,3360 5775,3630 6880,3630 6880,3350
  lines w10 net S$45294: 2475,4685 4750,4685 4750,5025
  text "DCDC-5V降压稳压电路" at 4605,4765 h196.85
  text "ESP32开发学习板v1.0 / 物联网基础套件" at 5540,3465 h157.48
  text "引脚使用" at 6745,3430 h196.85
  text "温湿度传感器Data->D5" at 6840,3255 h78.74
  text "有源蜂鸣器正极->D15" at 6835,3175 h78.74
  text "氨气传感器AO->D35 DO->D34" at 6835,3095 h78.74
  text "硫化氢传感器AO->D32 DO->D33" at 6835,3015 h78.74
  text "乙醇传感器AO->D25 DO->D26" at 6835,2940 h78.74
  text "摇杆 X->D36 Y->D39" at 6830,2865 h78.74
  text "OLED SDA->D21 SCL->D22" at 6830,2795 h78.74
  text "按键 D23 D19 D18 D4" at 6825,2715 h78.74
  text "LED灯 D27 D2 D12 D13" at 6825,2635 h78.74
Top Solder:
  text "太原青禾之道科技有限公司" at 6860,2375 h78.74

## Text inside footprints (layer, text, board x,y; h text height)
BUZZER1: Top Overlay "+" at 5303.18,5547.68 h50 r135
U2: Top Overlay "GND" at 4280.3,5919.7 h40; Top Overlay "D5" at 4480.3,5919.7 h40; Top Overlay "VCC" at 4580.3,5919.7 h40